# EAGLE board ece411_t2_schematic_7 (EAGLE 9.5.2)
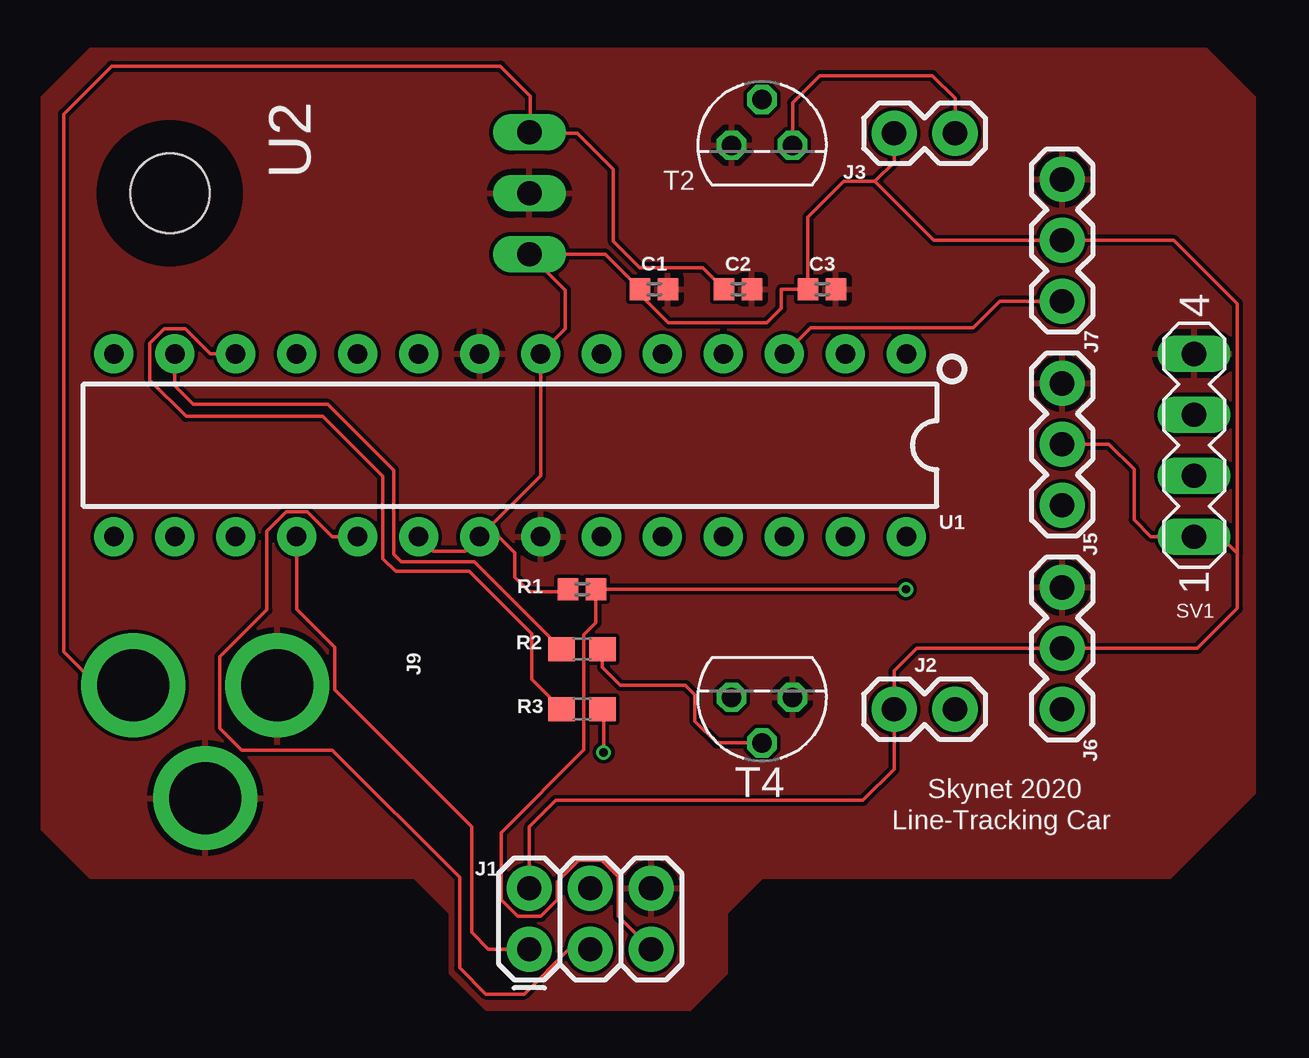
[diagram p0: board, top side]
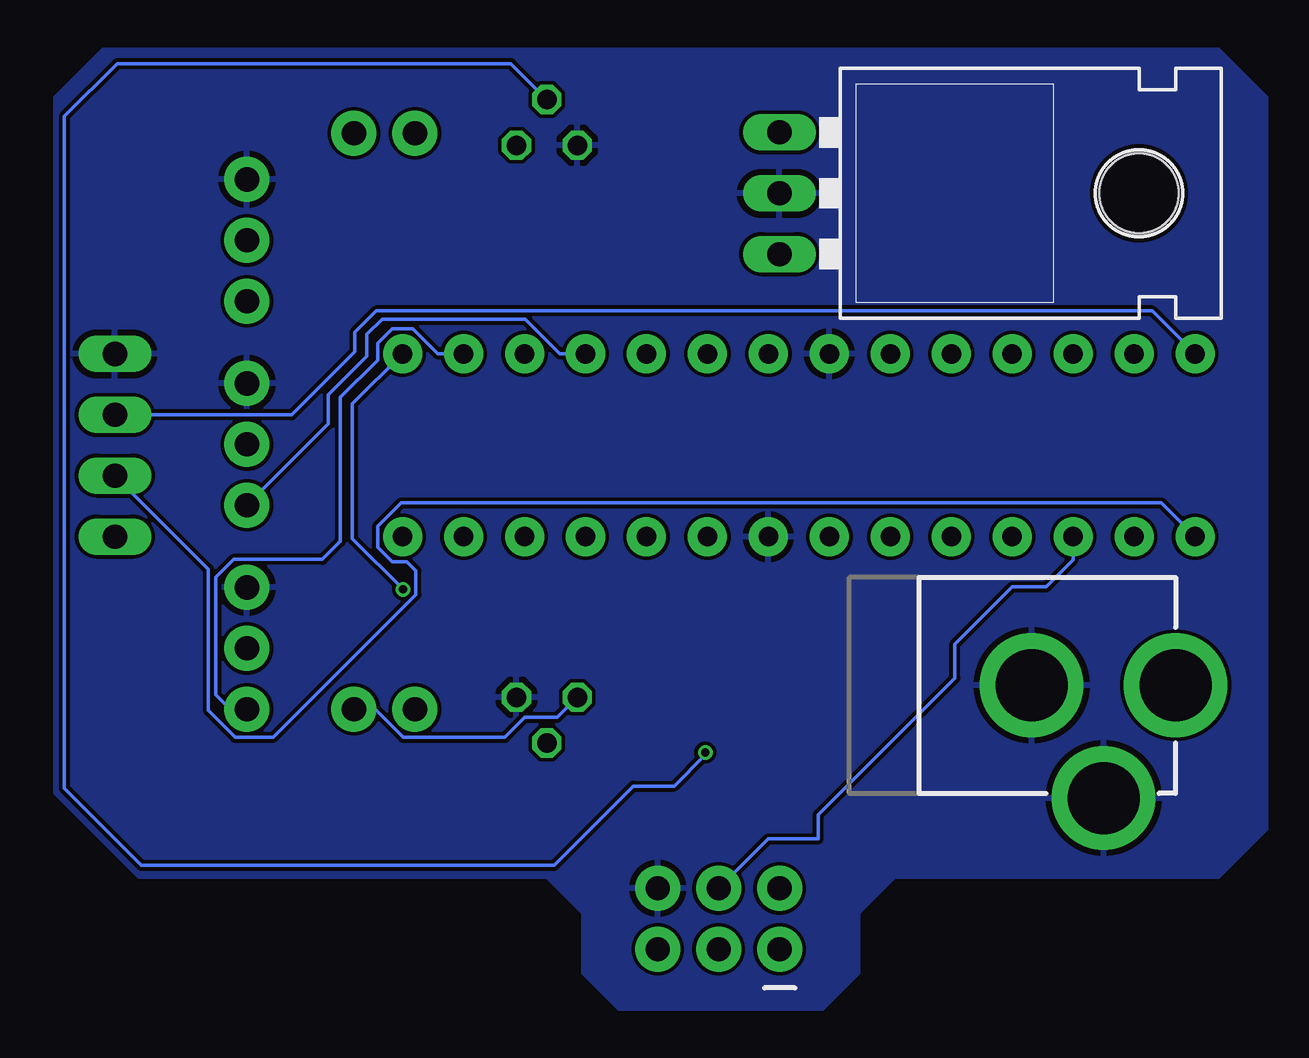
[diagram p1: board, bottom side, seen from below]

No outline drawn. Coordinates in mm, seen from the top.
Copper layers (1*16): Top 0.035559375mm / dielectric 1.6mm / Bottom 0.035559375mm
Design rules "oshpark-2layer": minimum track width 6mil, minimum drill 10mil, track to track 6mil, track to pad 6mil, pad to pad 6mil, via to via 6mil, smd to smd 6mil, copper to edge 15mil, drill to drill 6mil, minimum pad ring 5mil, minimum via ring 5mil, stop-mask expansion 2.5mil, vias tented up to drill 0mil, thermal gap 10mil

## Footprints (pad centres in the part's own frame; a part is rotated, then mirrored left to right if it is on the bottom)
0402 = smd 0.85 x 0.9: 1 -0.58,0; 2 0.58,0
2X3 = drill 1.016 pad 1.88: 1 0,0; 2 0,2.54; 3 2.54,0; 4 2.54,2.54; 5 5.08,0; 6 5.08,2.54
1X02 = drill 1.016 pad 1.88: 1 0,0; 2 2.54,0
1X03 = drill 1.016 pad 1.88: 1 0,0; 2 2.54,0; 3 5.08,0
POWER_JACK_PTH = drill 2.997 pad 4.318: GND 0,7.7; GNDBREAK 4.7,10.7; PWR 0,13.7
0603 = smd 1.1 x 1: 1 -0.85,0; 2 0.85,0
MA04-1 = drill 1.016 long: 1 -3.81,0; 2 -1.27,0; 3 1.27,0; 4 3.81,0
TO92 = drill 0.813 octagon: 1 1.27,0; 2 0,1.905; 3 -1.27,0
DIP28 = drill 0.813 pad 1.626: 1 -16.51,-3.81; 2 -13.97,-3.81; 3 -11.43,-3.81; 4 -8.89,-3.81; 5 -6.35,-3.81; 6 -3.81,-3.81; 7 -1.27,-3.81; 8 1.27,-3.81; 9 3.81,-3.81; 10 6.35,-3.81; 11 8.89,-3.81; 12 11.43,-3.81; 13 13.97,-3.81; 14 16.51,-3.81; 15 16.51,3.81; 16 13.97,3.81; 17 11.43,3.81; 18 8.89,3.81; 19 6.35,3.81; 20 3.81,3.81; 21 1.27,3.81; 22 -1.27,3.81; 23 -3.81,3.81; 24 -6.35,3.81; 25 -8.89,3.81; 26 -11.43,3.81; 27 -13.97,3.81; 28 -16.51,3.81
TO-220-ALT = drill 1.016 long: GND 0,-3.81; IN -2.54,-3.81; OUT 2.54,-3.81 | hole 3.302: 0,11.176

## Placement (x,y rotation side)
C1  0.1uF  [0402]  57,43 0 top
C2  0.1uF  [0402]  60.5,43 0 top
C3  0.1uF  [0402]  64,43 0 top
J1  AVR_SPI_PROG_3X2PTH  [2X3]  51.8,15.5 0 top
J2  Right Motor  [1X02]  67,25.5 0 top
J3  Left Motor  [1X02]  67,49.5 0 top
J5  455-1750-1-ND  [1X03]  74,34 90 top
J6  455-1750-1-ND  [1X03]  74,25.5 90 top
J7  455-1750-1-ND  [1X03]  74,42.5 90 top
J9  POWER_JACK  [POWER_JACK_PTH]  49,26.5 270 bottom
R1  10k  [0402]  54,30.5 0 top
R2  2.2k  [0603]  54,28 0 top
R3  2.2k  [0603]  54,25.5 0 top
SV1  HC-SR04  [MA04-1]  79.5,36.5 90 top
T2  2N3904  [TO92]  61.5,49 0 top
T4  2N3904  [TO92]  61.5,26 180 top
U1  328P  [DIP28]  51,36.5 180 top
U2  LM7805  [TO-220-ALT]  48,47 270 bottom

## Library data of the parts
C1-C3 = SparkFun-Capacitors; PROD_ID: CAP-14993
J1 = SparkFun-Connectors
J2 J3 = SparkFun-Retired
J5-J7 = SparkFun-Connectors; PROD_ID: XXX-00000
J9 = SparkFun-Connectors; PROD_ID: CONN-08197
R1 = SparkFun-Resistors; PROD_ID: RES-14241
R2 R3 = SparkFun-Resistors; PROD_ID: RES-08272
SV1 = con-lstb; OC_FARNELL: unknown; OC_NEWARK: unknown
T2 T4 = transistor
U1 = SparkFun-IC-Microcontroller; PROD_ID: IC-09136
U2 = SparkFun-IC-Power; PROD_ID: VREG-08450; SF_ID: COM-00107

## Nets
GND: C1.2 C2.2 C3.2 J1.6 J5.3 J6.3 J7.3 J9.GND J9.GNDBREAK SV1.4 T2.3 T4.3 U1.8 U1.22 U2.GND
MOSI: J1.4 U1.17
N$1: R3.1 U1.12
N$2: J3.2 T2.1
N$3: R2.2 T4.2
N$4: R3.2 T2.2
N$5: J1.1 U1.18
N$6: J2.2 T4.1
N$7: J5.1 U1.4
N$8: J7.1 U1.3
N$9: J6.1 U1.2
N$10: J1.5 R1.2 U1.1
N$11: SV1.2 U1.15
N$12: SV1.3 U1.14
N$15: R2.1 U1.13
SCK: J1.3 U1.19
VCC: C1.1 C3.1 J1.2 J2.1 J3.1 J5.2 J6.2 J7.2 R1.1 SV1.1 U1.7 U1.20 U1.21 U2.OUT
VIN: C2.1 J9.PWR U2.IN

## Tracks (layer width: path | path; a pad name or v marks a point on that pad's centre or on a via)
GND
  pour Top: 33.5,53 80,53 82,51 82,22 78.5,18.5 61.5,18.5 60,17 60,14.5 58.5,13 50,13 48.5,14.5 48.5,17 47,18.5 33.5,18.5 31.5,20.5 31.5,51
  pour Bottom: 31.5,51 33.5,53 80,53 82,51 82,22 78.5,18.5 61.5,18.5 60,17 60,14.5 58.5,13 50,13 48.5,14.5 48.5,17 47,18.5 33.5,18.5 31.5,20.5
MOSI
  Bottom 0.152: J1.4 52.28,20.1 50.2,20.1 50.2,21.1 44.5,26.8 44.5,28.2 42.1,30.6 40.7,30.6 39.57,31.73 U1.17
N$1
  Top 0.152: U1.12 38.5,40.31 37.46,41.35 36.6,41.35 35.99,40.74 35.99,39.21 37.5,37.7 43.2,37.7 45.7,35.2 45.7,31.78 46.23,31.24 49.31,31.24 51.9,28.65 51.9,26.75 R3.1
N$2
  Top 0.152: J3.2 69.54,50.96 68.6,51.9 63.9,51.9 62.77,50.77 T2.1
N$3
  Top 0.152: R2.2 54.85,27.25 55.6,26.5 58.3,26.5 58.7,26.1 58.7,25 59.6,24.09 T4.2
N$4  (via drill 0.35)
  Top 0.152: v54.9,23.7 54.9,25.45 R3.2
  Bottom 0.152: T2.2 62.99,52.4 79.4,52.4 81.6,50.2 81.6,22.2 78.4,19 61.2,19 57.9,22.3 56.2,22.3 54.9,23.6 v54.9,23.7
N$5
  Top 0.152: J1.1 50.1,15.5 49.4,16.2 49.4,20.6 43.69,26.31 43.69,28.09 42.11,29.67 U1.18
N$6
  Bottom 0.152: J2.2 68.65,25.5 67.48,24.33 63.25,24.33 62.42,25.16 61.07,25.16 T4.1
N$7
  Bottom 0.152: J5.1 70.61,37.4 70.61,38.59 69,40.2 69,41.12 68.37,41.76 62.4,41.76 60.96,40.31 U1.4
N$8
  Top 0.152: U1.3 63.52,41.4 70.3,41.4 71.4,42.5 J7.1
N$9
  Bottom 0.152: U1.2 66.04,40.31 67.08,41.35 67.94,41.35 68.55,40.74 68.55,40.05 70.1,38.5 70.1,32.5 70.85,31.75 74.55,31.75 75.3,31 75.3,26.1 74.7,25.5 J6.1
N$10  (via drill 0.35)
  Top 0.152: J1.5 55.51,16.87 55.51,18.52 54.82,19.21 53.86,19.21 52.97,18.32 52.97,17.56 52.28,16.87 51.32,16.87 50.63,17.56 50.63,20.36 54.07,23.8 54.07,28.59 54.58,29.1 R1.2 v67.49,30.5
  Bottom 0.152: U1.1 69.6,38.22 69.6,32.61 v67.49,30.5
N$11
  Bottom 0.152: SV1.2 75.61,31.34 75.61,25.45 74.48,24.33 72.91,24.33 66.96,30.28 66.96,31.27 67.34,31.65 67.94,31.65 68.55,32.26 68.55,33.12 67.57,34.1 35.9,34.1 U1.15
N$12
  Bottom 0.152: U1.14 36.28,42.1 68.6,42.1 69.5,41.2 69.5,40.4 72.13,37.77 SV1.3
N$15
  Top 0.152: R2.1 49.5,31.65 46.46,31.65 46.15,31.96 46.15,35.46 43.41,38.2 37.8,38.2 37.03,38.97 U1.13
SCK
  Top 0.152: J1.3 53.45,15.5 51.58,13.63 49.99,13.63 48.9,14.72 48.9,18.5 43.6,23.8 39.82,23.8 38.91,24.71 38.91,27.69 40.87,29.64 40.87,32.92 41.68,33.73 42.54,33.73 43.58,32.69 U1.19
VCC
  Top 0.152: R1.1 53.32,30.4 51.8,30.4 51.2,31 51.2,32.02 50.53,32.69 U1.21 | J3.1 67,48.3 66.2,47.5 | 66.2,47.5 64.9,47.5 63.41,46.01 C3.1 | J1.2 51.8,20.6 52.9,21.7 65.7,21.7 67,23 J2.1 67,27.1 67.94,28.04 J6.2 79.64,28.04 81.3,29.7 81.3,32 | U1.20 47.79,32.09 49.13,32.09 U1.21 | SV1.1 | 81.3,32 80.61,32.7 SV1.1 | 81.3,32 81.3,42.4 78.66,45.04 J7.2 68.66,45.04 66.2,47.5 | J5.2 75.95,36.54 77,35.49 77,33.4 77.7,32.7 SV1.1 | U1.21 52.27,35.23 U1.7 53.31,41.35 53.31,42.96 U2.OUT 54.96,44.46 C1.1 56.42,42.78 57.6,41.6 61.7,41.6 62.3,42.2 62.3,43 63.4,43 C3.1 | C3.1
VIN
  Top 0.152: C2.1 59.02,43.9 56.4,43.9 55.3,45 55.3,48 53.8,49.5 51.85,49.5 | 51.85,49.5 U2.IN | J9.PWR 33.8,26.5 32.4,27.9 32.4,50.3 34.4,52.3 50.6,52.3 51.85,51.05 51.85,49.5

## Text on the board
tPlace: Skynet 2020 | Line-Tracking Car